# Altium PCB Carte de Commande.PcbDoc
Units mm, origin at the board's own origin, x right, y up, seen from the top; angles counter-clockwise.
Board outline 44.58 x 84.33 mm, 2 copper layers (Top Layer, Bottom Layer); 9 components, 18 nets, 92 pads, 23 vias.
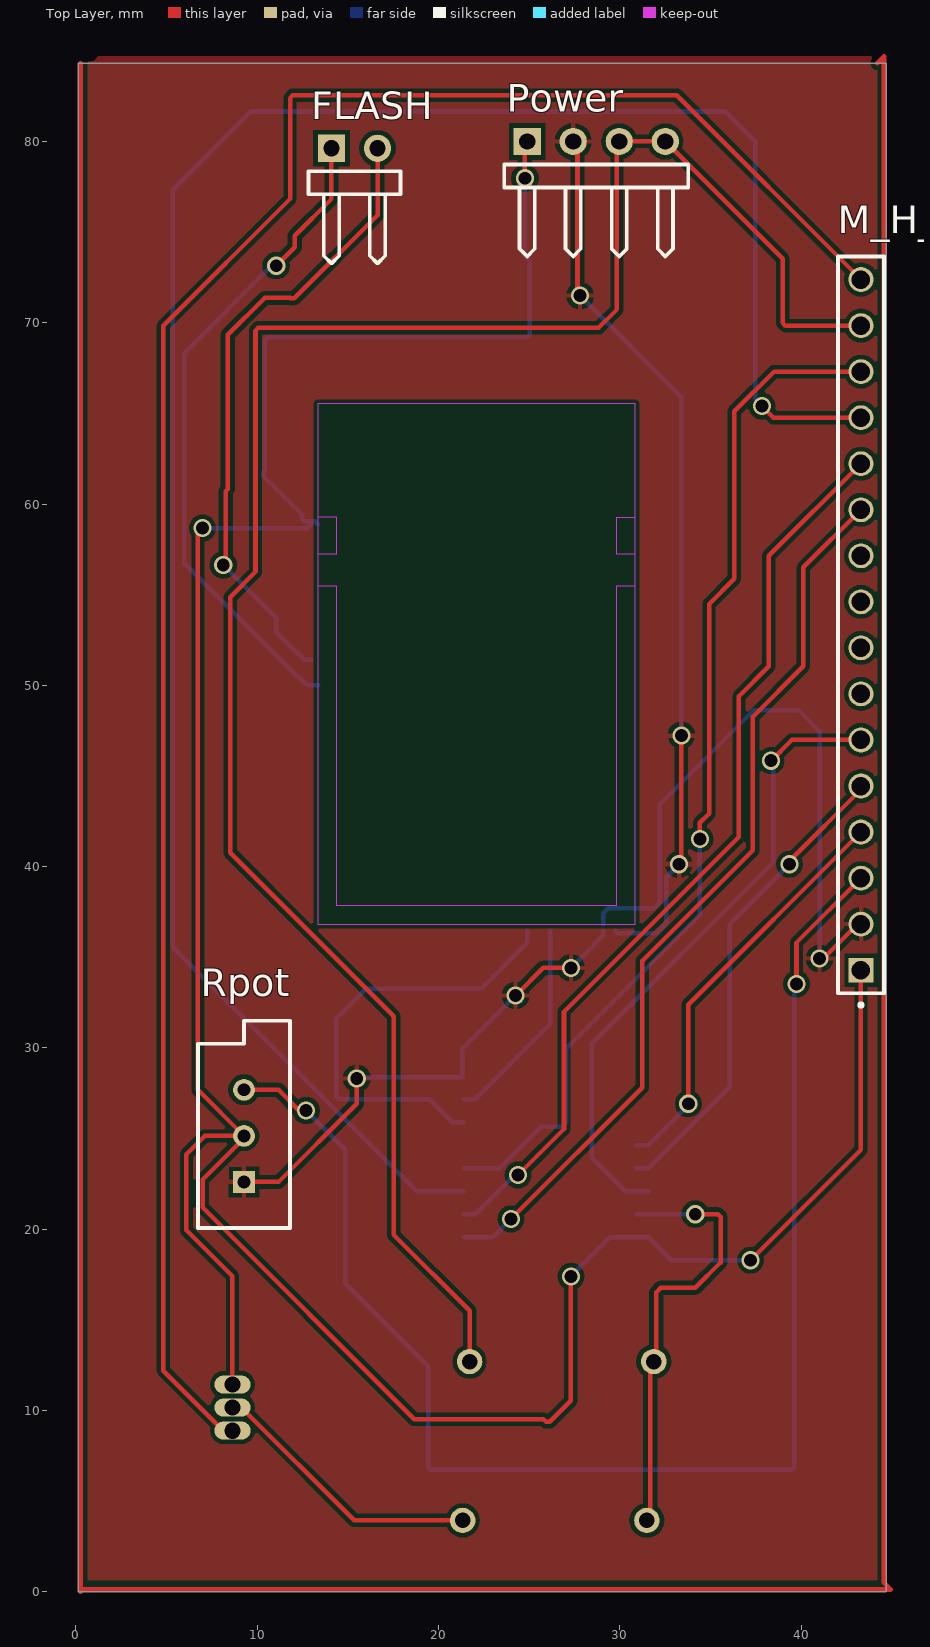
[diagram p0: Top Layer view]
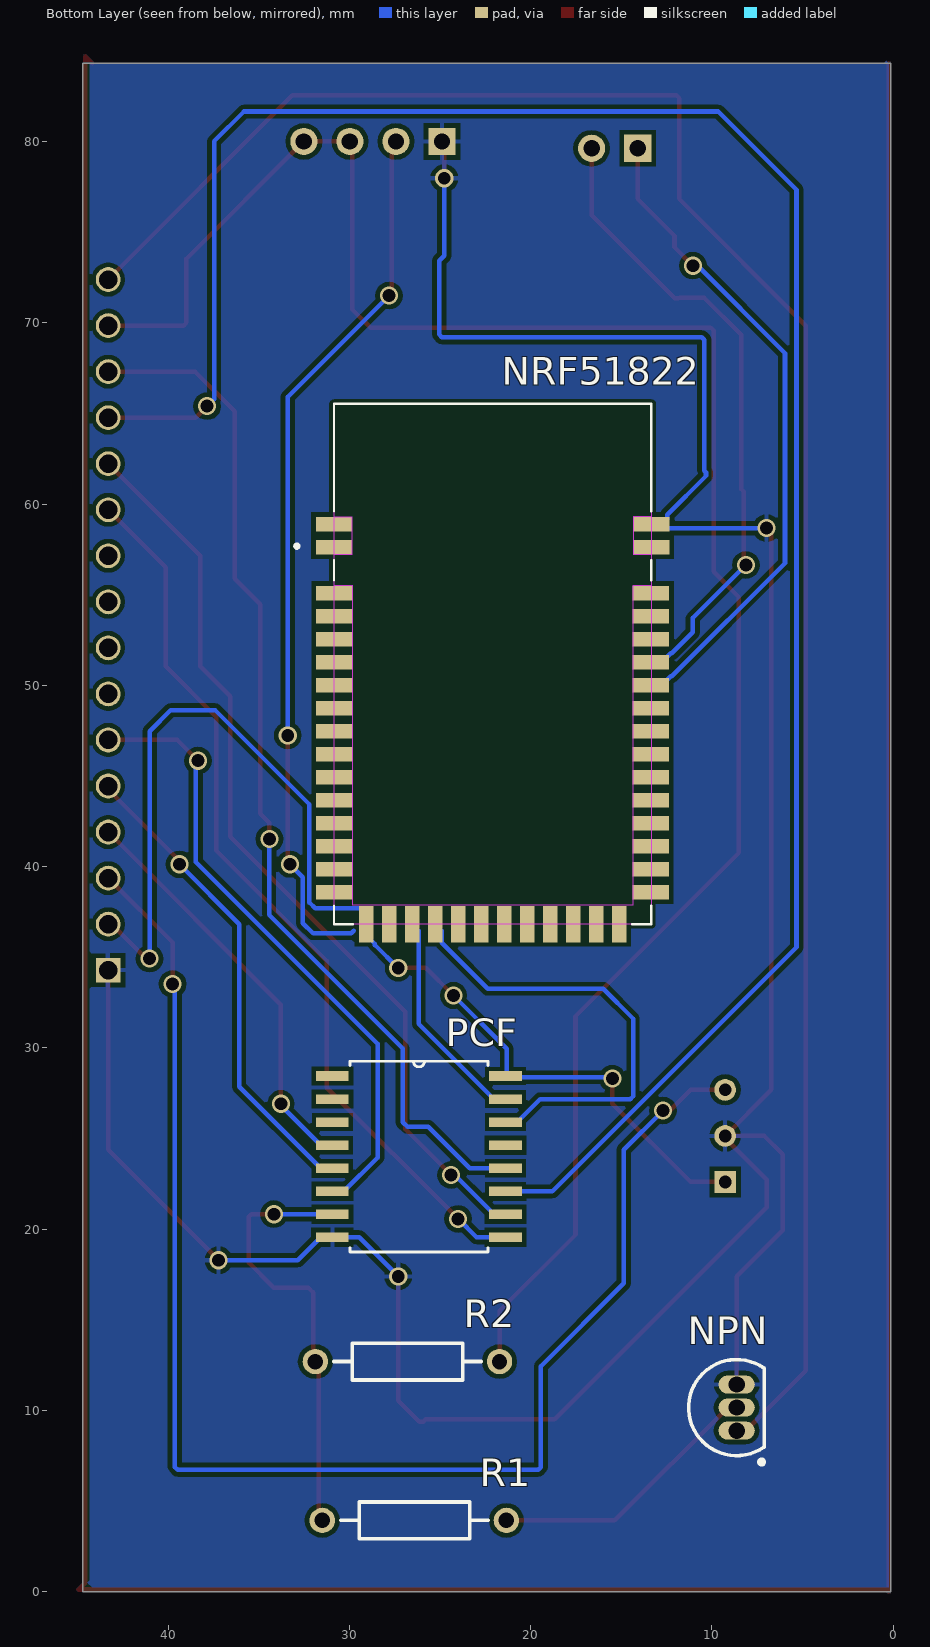
[diagram p1: Bottom Layer view, seen from below]

## Layer stack, top to bottom
Top Solder: solder mask 0.0102, Solder Resist, Dk 3.5
Top Layer: signal copper 0.0356
Dielectric 1: dielectric 0.32, FR-4, Dk 4.8
Bottom Layer: signal copper 0.0356
Bottom Solder: solder mask 0.0102, Solder Resist, Dk 3.5

## Board outline
0.127,0 44.704,0 44.704,84.328 0.127,84.328

## Design rules (kind name [scope] priority, off if disabled: settings)
Clearance [All] p1: gap=0.25 ignorepadtopadclearanceinfootprint=FALSE
ComponentClearance [All] p1 off: gap=0.254 collisioncheckmode=3 verticalgap=0.254 showdistances=FALSE
PolygonConnect [All] p1: connectstyle=Relief reliefconductorwidth=0.254 reliefentries=4 polygonreliefangle="90 Angle" airgapwidth=0.254
RoutingVias [All] p1: holewidth=0.711 width=1 viastyle="Through Hole" minholewidth=0.711 minwidth=1 maxholewidth=0.711 maxwidth=1
SolderMaskExpansion [All] p1: expansion=0.102 istentingtop=FALSE
Width [All] p1: maxlimit=0.25 minlimit=0.2 preferedwidth=0.25
29 further rules are at their usual default settings.

## Components (designator, comment, footprint, x,y, rotation, side; value= is the part's Value field where it differs from the comment)
FLASH "Header 2H" HDR1X2H 14.097,79.629 r0 top
M_H_16 "MALE_HEADERS_16" male_headers_16 43.307,34.29 r90 top
NPN "NPN" TO-226-AA 8.636,10.16 r180 bottom
NRF51822 "E73-2G4M04S1D" XCVR_E73-2G4M04S1B 22.098,51.181 r180 bottom
PCF "PCF8574T" SOIC127P1032X265-16N 26.162,24.003 r180 bottom
Power "header 4H" HDR1X4H 24.892,80.01 r0 top
R1 "" AXIAL-0.4 26.416,3.937 r180 bottom value=R1000
R2 "" AXIAL-0.4 26.797,12.7 r180 bottom value=R220
Rpot "RPot" VR5 9.271,25.146 r90 top value=1K

## Footprints (in the part's own frame and the unit in brackets; to place one, negate y for a bottom-side part, rotate by r counter-clockwise, add the part's x,y. Pads: shape width x height; smd on the part's side, far side on the other; paste and mask are expansions set on the pad)
AXIAL-0.4 [mm] "Axial Device, Thru-Hole; 2 Leads; 0.4 in Pin Spacing"
  round 1.4 hole 0.85: 1(-5.08,0) 2(5.08,0)
  silkscreen extent -4.06,-1.02 4.06,1.02
HDR1X2H [mm] "Connector; Header; 2 Position; Right Angle"
  rect 1.5x1.5 hole 0.9: 1(0,0)
  round 1.5 hole 0.9: 2(2.54,0)
  silkscreen extent -1.27,-6.35 3.81,-1.27
HDR1X4H [mm] "Connector; Header; 4 Position; Right Angle"
  rect 1.5x1.5 hole 0.9: 1(0,0)
  round 1.5 hole 0.9: 2(2.54,0) 3(5.08,0) 4(7.62,0)
  silkscreen extent -1.27,-6.35 8.89,-1.27
male_headers_16 [mm]
  rect 1.37x1.37 hole 1.02: 01(0,0)
  round 1.37 hole 1.02: 02(2.54,0) 03(5.08,0) 04(7.62,0) 05(10.16,0) 06(12.7,0) 07(15.24,0) 08(17.78,0) 09(20.32,0) 10(22.86,0) 11(25.4,0) 12(27.94,0) 13(30.48,0) 14(33.02,0) 15(35.56,0) 16(38.1,0)
  silkscreen extent -2.02,-1.27 39.37,1.27, body extent -1.4,-1.27 39.37,1.27, height 8.38
SOIC127P1032X265-16N [mil]
  rect 71x21 smd: 1(-188,175) 2(-188,125) 3(-188,75) 4(-188,25) 5(-188,-25) 6(-188,-75) 7(-188,-125) 8(-188,-175) 9(188,-175) 10(188,-125) 11(188,-75) 12(188,-25) 13(188,25) 14(188,75) 15(188,125) 16(188,175)
  silkscreen extent -150,-207 150,207, body extent -203,-203 203,203, height 104
TO-226-AA [mm] "TO, Flat Index; 3 In-Line, Axial Leads; Body Dia. 4.8mm; Leads 0.55 x 0.51 mm (max)"
  oval 2x1 hole 0.9: 1(0,-1.27) 2(0,0) 3(0,1.27)
  silkscreen extent -2.65,-3.13 1.52,2.65, body extent -2.65,-2.66 1.52,2.66, height 5.33
VR5 [mm] "Thru-Hole; 3 Leads"
  rect 1.2x1.2 hole 0.7: 1(-2.54,0)
  round 1.2 hole 0.7: 2(0,0) 3(2.54,0)
  silkscreen extent -5.08,-2.54 6.35,2.54
XCVR_E73-2G4M04S1B [mm]
  rect 2x0.8 smd: 0(-8.75,7.715) 1(-8.75,6.445) 2(-8.73,3.905) 3(-8.73,2.635) 4(-8.73,1.365) 5(-8.73,0.095) 6(-8.73,-1.175) 7(-8.73,-2.445) 8(-8.73,-3.715) 9(-8.73,-4.985) 10(-8.73,-6.255) 11(-8.73,-7.525) 12(-8.73,-8.795) 13(-8.73,-10.065) 14(-8.73,-11.335) 15(-8.73,-12.605) 28(8.73,-12.605) 29(8.73,-11.335) 30(8.73,-10.065) 31(8.73,-8.795) 32(8.73,-7.525) 33(8.73,-6.255) 34(8.73,-4.985) 35(8.73,-3.715) 36(8.73,-2.445) 37(8.73,-1.175) 38(8.73,0.095) 39(8.73,1.365) 40(8.73,2.635) 41(8.73,3.905) 42(8.75,6.445) 43(8.75,7.715)
  rect 0.8x2 smd: 16(-6.985,-14.35) 17(-5.715,-14.35) 18(-4.445,-14.35) 19(-3.175,-14.35) 20(-1.905,-14.35) 21(-0.635,-14.35) 22(0.635,-14.35) 23(1.905,-14.35) 24(3.175,-14.35) 25(4.445,-14.35) 26(5.715,-14.35) 27(6.985,-14.35)
  Keep-Out Layer region: 8.75,8.115 7.75,8.115 7.75,6.045 8.75,6.045 8.75,4.305 7.73,4.305 7.73,-13.3 -7.73,-13.3 -7.73,4.305 -8.75,4.305 -8.75,6.045 -7.75,6.045 -7.75,8.1 -8.75,8.1 -8.75,14.35 8.75,14.35
  Keep-Out Layer region: 8.75,-14.35 -8.75,-14.35 -8.75,14.35 8.75,14.35
  silkscreen extent -10.9,-14.35 8.75,14.35

## Part data
FLASH: "Header, 2-Pin, Right Angle", LatestRevisionDate=17-Jul-2002, LatestRevisionNote="Re-released for DXP Platform.", Publisher="Altium Limited"
M_H_16: Package=None, Availability=Unavailable, MP=TSW-116-23-S-S-LL, Price=None
NPN: "NPN Bipolar Transistor", Code_JEDEC=TO-226-AA, LatestRevisionDate=17-Jul-2002, LatestRevisionNote="Re-released for DXP Platform.", PackageDescription="TO, Flat Index; 3 In-Line, Axial Leads; Body Dia. 4.8mm; Leads 0.55 x 0.51 mm (max)", PackageReference=TO-226-AA, Published=8-Jun-2000, Publisher="Altium Limited"
NRF51822: library part E73-2G4M04S1B, "nRF52832 BLE 4.2/5.0 SMD Wireless Module", Package=Package, Availability=Unavailable, MF=EBYTE, MP=E73-2G4M04S1B, Price=None, SnapEDA_Link=https://www.snapeda.com/parts/E73-2G4M04S1B/EBYTE/view-part/4219264/?ref=snap
PCF: "I/O Expander 8 IÂ²C 100 kHz 20-SSOP", Package="SOIC-16 NXP Semiconductors", Availability="In Stock", Check_prices=https://www.snapeda.com/parts/PCF8574T/NXP+Semiconductors/view-part/?ref=eda, MF="NXP Semiconductors", MP=PCF8574T, Price=None, Purchase-URL=https://pricing.snapeda.com/search/part/PCF8574T/?ref=eda, SnapEDA_Link=https://www.snapeda.com/parts/PCF8574T/NXP+Semiconductors/view-part/?ref=snap
Power: library part "Header 4H", "Header, 4-Pin, Right Angle", LatestRevisionDate=17-Jul-2002, LatestRevisionNote="Re-released for DXP Platform.", Publisher="Altium Limited"
R1 R2: library part Res2, "Resistor", LatestRevisionDate=17-Jul-2002, LatestRevisionNote="Re-released for DXP Platform.", PackageDescription="Axial Device, Thru-Hole; 2 Leads; 0.4 in Pin Spacing", PackageReference=AXIAL-0.4, Published=8-Jun-2000, Publisher="Altium Limited"
Rpot: "Potentiometer", LatestRevisionDate=17-Jul-2002, LatestRevisionNote="Re-released for DXP Platform.", PackageDescription="Variable Resistor, Thru-Hole; 3 Leads", PackageReference=VR5, Published=8-Jun-2000, Publisher="Altium Limited", Set Position=0.5, Sim Note="Enter the Resistance value and the set point into parameter fields."

## Via types
v1: diameter 1, hole 0.711, Top Layer to Bottom Layer, 23 vias

## Nets (pads, with @x,y where several pads share a name; then routed paths per layer and width w, separated by ;. In a path a pad name is that pad's centre, name@x,y a point inside that pad or via, vN(x,y) a via of type N, cw(c..) or ccw(c..) an arc to the next point about the centre after c; other vN are vias at no path point)
BACK: M_H_16.15 Power.3 Power.4 R2.2 | length 112.3
  Top Layer w0.25: R2.2 21.717,15.494 17.526,19.685 17.526,31.75 8.509,40.767 8.509,54.864 9.906,56.261 9.906,69.577 10.052,69.723 28.829,69.723 29.845,70.739 29.845,79.883 Power.3 Power.4 38.989,73.533 38.989,69.996 39.135,69.85 M_H_16.15
DB4: M_H_16.11 PCF.9 | length 50.1
  Top Layer w0.25: v1(24.003,20.574) 31.242,27.813 31.242,34.798 37.338,40.894 37.338,48.26 40.132,51.054 40.132,56.515 M_H_16.11
  Bottom Layer w0.25: PCF.9 22.987,19.558 v1(24.003,20.574)
DB5: M_H_16.12 PCF.10 | length 51
  Top Layer w0.25: v1(24.384,22.987) 26.924,25.527 26.924,32.004 36.576,41.656 36.576,49.403 38.227,51.054 38.227,57.15 M_H_16.12
  Bottom Layer w0.25: PCF.10 22.022,20.828 24.037,22.843 24.24,22.843 v1(24.384,22.987)
DB6: M_H_16.13 PCF.11 | length 118.5
  Top Layer w0.25: v1(37.846,65.405) 38.481,64.77 M_H_16.13
  Bottom Layer w0.25: PCF.11 18.796,22.098 5.334,35.56 5.334,77.343 9.652,81.661 35.814,81.661 37.465,80.01 37.465,65.786 v1(37.846,65.405)
DB7: M_H_16.14 PCF.12 | length 57.7
  Top Layer w0.25: v1(34.417,41.529) 34.417,42.418 34.925,42.926 34.925,54.483 36.322,55.88 36.322,65.118 38.514,67.31 M_H_16.14
  Bottom Layer w0.25: PCF.12 23.368,23.368 25.654,25.654 26.797,25.654 27.051,25.908 27.051,29.972 34.417,37.338 v1(34.417,41.529)
E: M_H_16.06 PCF.6 | length 35.4
  Top Layer w0.25: v1(38.354,45.847) 39.497,46.99 M_H_16.06
  Bottom Layer w0.25: PCF.6@31.572,22.098 PCF.6 30.302,22.098 28.448,23.952 28.448,30.226 38.481,40.259 38.481,45.72 v1(38.354,45.847)
GND: M_H_16.01 NPN.3 NRF51822.43 PCF.8 Power.1 Rpot.2 | length 163.3
  Top Layer w0.25: v1(6.985,58.674) 6.731,58.42 6.731,27.686 Rpot.2 ; NPN.3 8.636,17.399 6.096,19.939 6.096,24.13 7.112,25.146 Rpot.2 ; v1(24.765,77.978) 24.765,79.883 Power.1 ; v1(27.305,17.399) 27.305,10.541 26.139,9.375 25.931,9.375 25.781,9.525 18.669,9.525 6.985,21.209 6.985,22.733 9.271,25.019 Rpot.2 ; v1(37.211,18.288) 43.307,24.384 M_H_16.01
  Bottom Layer w0.25: v1(6.985,58.674) 12.751,58.674 NRF51822.43@12.973,58.896 ; NPN.3@8.136,11.43 NPN.3 ; NRF51822.43 13.189,59.055 12.589,59.055 12.473,59.171 12.473,59.409 10.327,61.555 10.327,61.762 10.414,61.849 10.414,69.069 10.56,69.215 24.9,69.215 25.046,69.361 25.046,73.428 24.765,73.709 v1(24.765,77.978) ; v1(27.305,17.399) 29.464,19.558 PCF.8 31.572,19.558 32.842,18.288 v1(37.211,18.288)
NetM_H_16_03: M_H_16.03 Rpot.3 | length 80.7
  Top Layer w0.25: Rpot.3 11.176,27.686 12.319,26.543 v1(12.7,26.543) ; v1(39.751,33.528) 39.751,35.814 M_H_16.03
  Bottom Layer w0.25: v1(12.7,26.543) 14.859,24.384 14.859,17.018 19.431,12.446 19.431,6.877 19.577,6.731 39.478,6.731 39.624,6.877 39.624,33.401 v1(39.751,33.528)
NetM_H_16_16: M_H_16.16 NPN.1 | length 114
  Top Layer w0.25: NPN.1 8.136,8.89 4.826,12.2 4.826,69.85 11.811,76.835 11.811,82.404 11.957,82.55 33.147,82.55 M_H_16.16
NetNPN_2: NPN.2 R1.2 | length 15.3
  Top Layer w0.25: NPN.2 9.136,10.16 15.359,3.937 R1.2
NetPCF_7: PCF.7 R1.1 R2.1 | length 24.8
  Top Layer w0.25: R1.1 31.686,4.127 31.686,12.509 R2.1 32.004,12.827 32.004,16.51 32.258,16.764 34.163,16.764 35.56,18.161 35.56,20.682 35.414,20.828 v1(34.163,20.828)
  Bottom Layer w0.25: PCF.7 v1(34.163,20.828) ; R1.1 R1.1@31.686,4.127 ; R2.1@31.686,12.509 R2.1
R/W: M_H_16.05 PCF.5 | length 26.6
  Top Layer w0.25: v1(39.37,40.132) 39.37,40.323 43.307,44.26 M_H_16.05
  Bottom Layer w0.25: PCF.5 31.572,23.368 36.068,27.864 36.068,36.83 v1(39.37,40.132)
RS: M_H_16.04 PCF.4 | length 22.8
  Top Layer w0.25: v1(33.782,26.924) 33.782,32.385 M_H_16.04
  Bottom Layer w0.25: PCF.4 31.572,24.638 33.782,26.848 v1(33.782,26.924)
SCL: NRF51822.19 PCF.14 | length 24.9
  Bottom Layer w0.25: PCF.14 20.752,25.908 19.482,27.178 14.497,27.178 14.351,27.324 14.351,31.623 16.002,33.274 22.376,33.274 24.898,35.796 NRF51822.19@24.898,36.456
SDA: NRF51822.18 PCF.15 | length 11.6
  Bottom Layer w0.25: PCF.15 22.022,27.178 26.168,31.324 NRF51822.18@26.168,36.456
SWDCLK: FLASH.1 NRF51822.37 | length 36.6
  Top Layer w0.25: v1(11.049,73.152) 12.065,74.168 12.065,74.803 14.097,76.835 FLASH.1
  Bottom Layer w0.25: v1(11.049,73.152) 11.026,73.175 10.818,73.175 5.969,68.326 5.969,56.745 12.213,50.501 12.273,50.501 12.768,50.006 NRF51822.37
SWDIO: FLASH.2 NRF51822.38 | length 35
  Top Layer w0.25: v1(8.128,56.642) 8.255,56.769 8.255,60.706 8.382,60.833 8.382,69.342 10.414,71.374 11.811,71.374 11.834,71.351 12.042,71.351 16.637,75.946 FLASH.2
  Bottom Layer w0.25: v1(8.128,56.642) 11.049,53.721 11.049,52.935 12.213,51.771 12.273,51.771 12.628,51.416 NRF51822.38@12.973,51.416
VCC: M_H_16.02 NRF51822.16 PCF.16 Power.2 Rpot.1 | length 113
  Top Layer w0.25: Rpot.1 11.176,22.606 15.494,26.924 v1(15.494,28.321) ; v1(24.257,32.893) 25.781,34.417 v1(27.305,34.417) ; Power.2 27.669,79.773 27.669,71.645 v1(27.813,71.501) ; v1(33.274,40.132) 33.401,40.259 v1(33.401,47.244) ; v1(41.021,34.925) 41.211,34.925 43.116,36.83 M_H_16.02
  Bottom Layer w0.25: v1(15.494,28.321) 15.557,28.384 21.323,28.384 21.323,29.959 v1(24.257,32.893) ; v1(27.305,34.417) 27.329,34.417 28.588,35.676 28.588,35.736 29.083,36.231 NRF51822.16@29.083,36.456 ; v1(27.813,71.501) 33.401,65.913 v1(33.401,47.244) ; NRF51822.16 29.083,37.431 29.358,37.706 31.888,37.706 32.203,38.021 32.203,43.434 37.41,48.641 39.859,48.641 41.021,47.479 v1(41.021,34.925) ; 29.758,36.456 29.892,36.322 32.004,36.322 32.567,36.885 32.567,39.425 v1(33.274,40.132)
pads on no net: M_H_16.07 M_H_16.08 M_H_16.09 M_H_16.10 NRF51822.0 NRF51822.1 NRF51822.2 NRF51822.3 NRF51822.4 NRF51822.5 NRF51822.6 NRF51822.7 NRF51822.8 NRF51822.9 NRF51822.10 NRF51822.11 NRF51822.12 NRF51822.13 NRF51822.14 NRF51822.15 NRF51822.17 NRF51822.20 NRF51822.21 NRF51822.22 NRF51822.23 NRF51822.24 NRF51822.25 NRF51822.26 NRF51822.27 NRF51822.28 NRF51822.29 NRF51822.30 NRF51822.31 NRF51822.32 NRF51822.33 NRF51822.34 NRF51822.35 NRF51822.36 NRF51822.39 NRF51822.40 NRF51822.41 NRF51822.42 PCF.1 PCF.2 PCF.3 PCF.13
copper on no net: | length 214.4
  Top Layer w0.254: 0.254,84.328 0.254,0 0.381,0.127 44.958,0.127 44.577,0.508 44.577,84.709 44.196,84.328

## Polygon pours and split planes (outlines as drawn)
VCC on Top Layer "VCC_L01_P001" (solid, pour order 1): 0.254,84.328 0.381,84.201 0.381,0.635 44.45,0.635 44.577,0.508 44.577,84.709 1.27,84.709 1.016,84.455
GND on Bottom Layer "GND_L02_P003" (solid, pour order 3): 0.381,84.455 0.508,84.328 44.323,84.328 44.323,0.635 44.45,0.508 44.196,0.254 0.254,0.254 0.254,84.455 0.381,84.582 44.196,84.582

## Text inside footprints (layer, text, board x,y; h text height)
NRF51822: Mechanical 13 "Avoid traces in Bottom Layer" at 27.098,49.181 h0.64; Mechanical 13 "under the module" at 27.098,48.181 h0.64